# EAGLE board AutoSpiel v1.2b FEDC DRU (EAGLE 9.2.0)
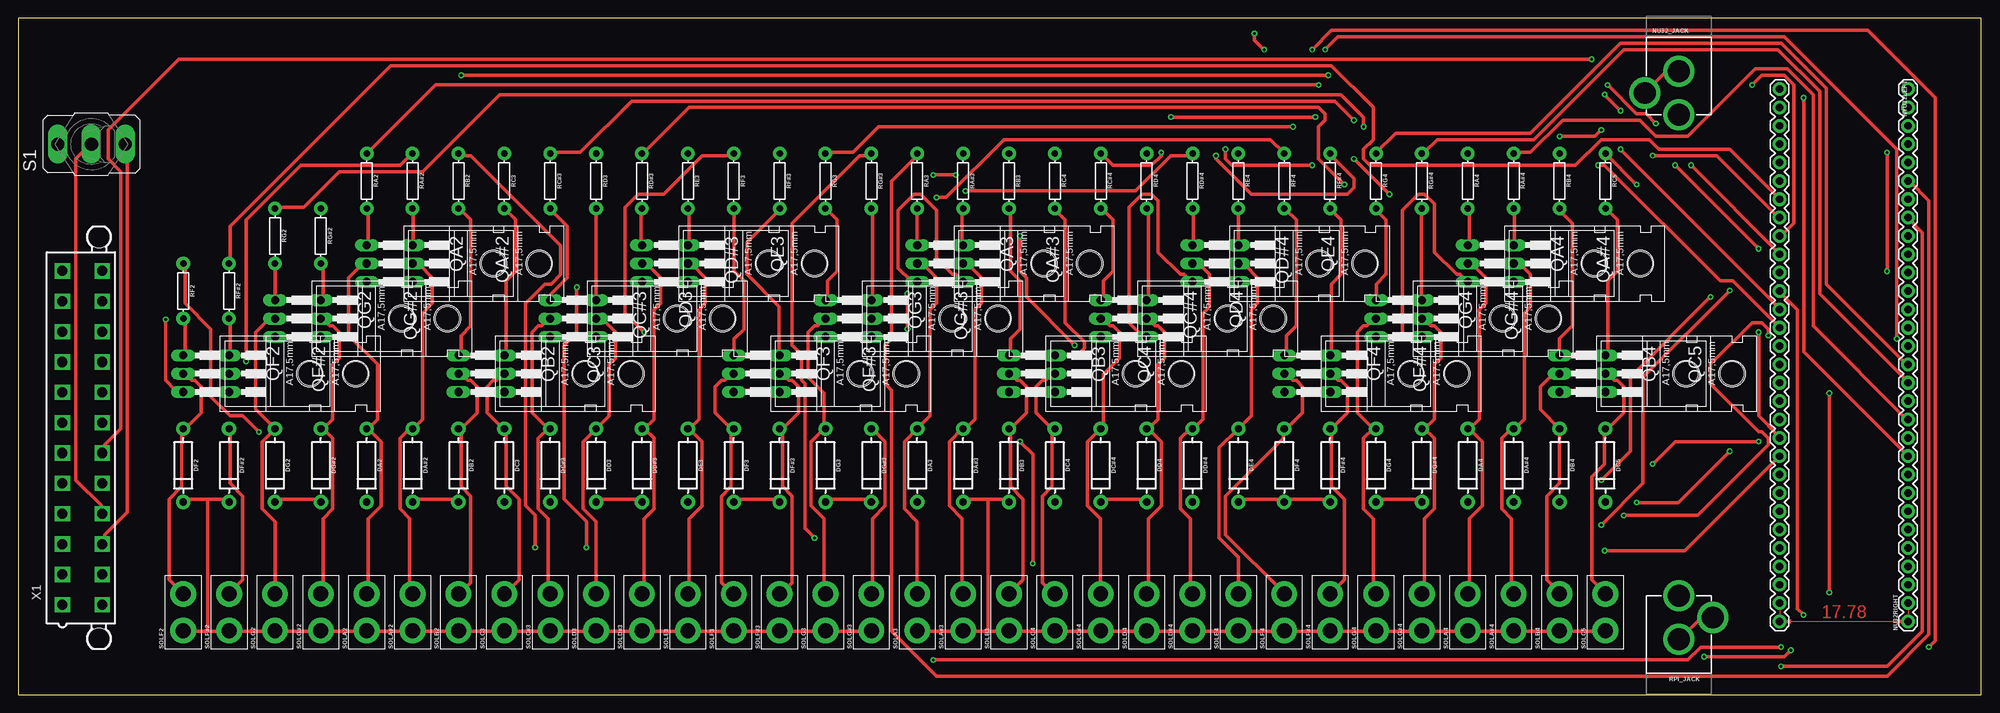
[diagram p0: board, top side]
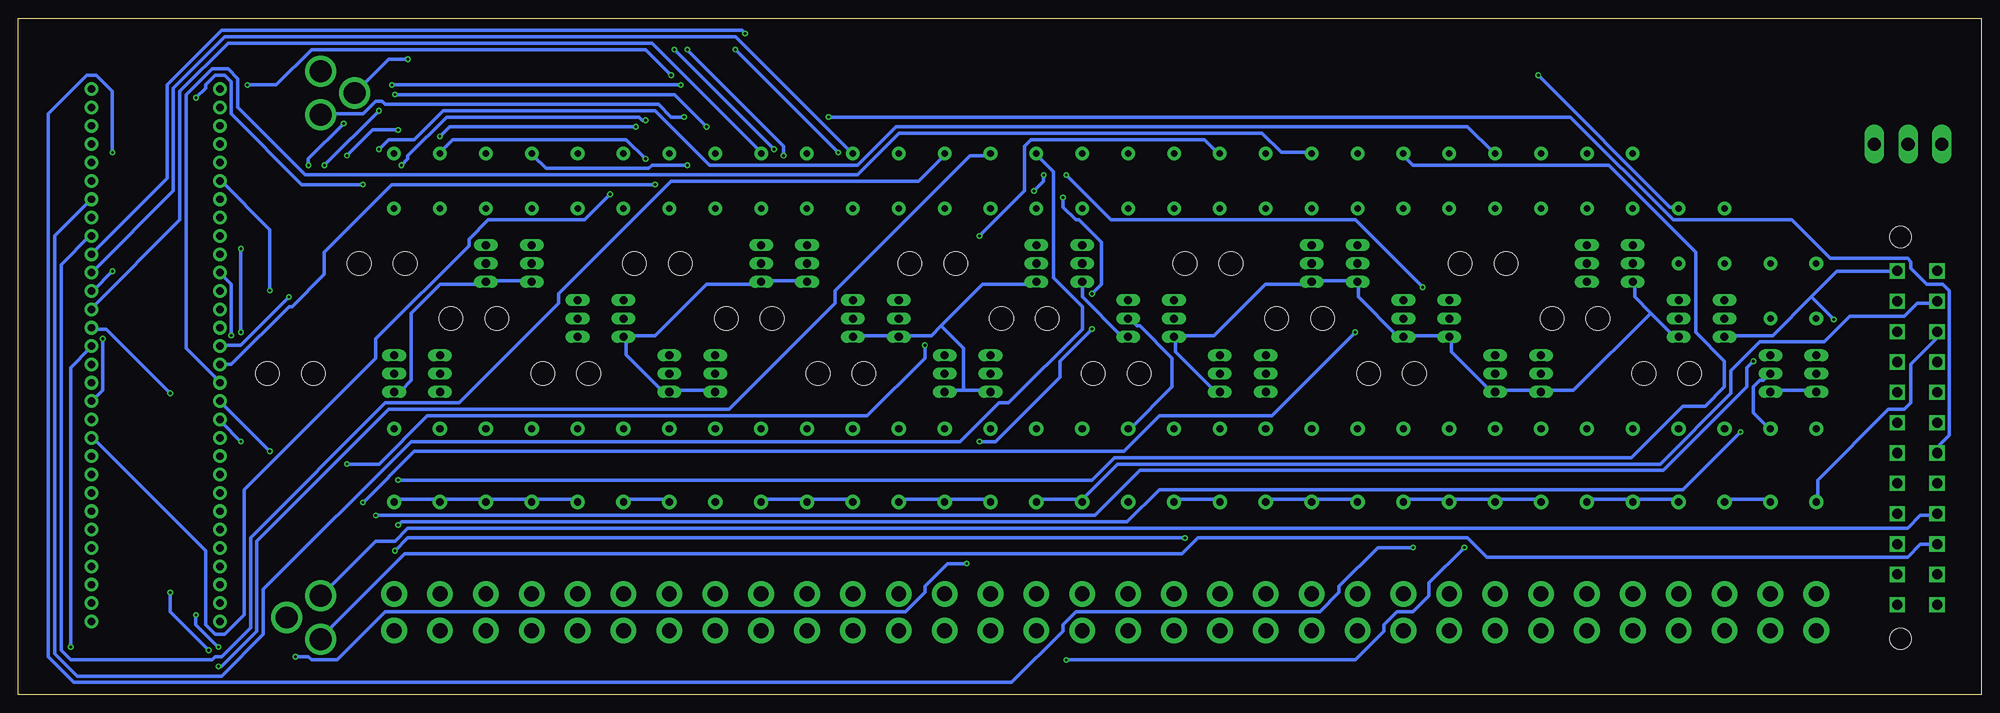
[diagram p1: board, bottom side, seen from below]

Size 271.76 x 93.65 mm. Coordinates in mm from the lower left corner, seen from the top.
Outline: 0,0 271.76,0 271.76,93.65 0,93.65 0,0
Copper layers (1*16): Top 0.035mm / dielectric 1.5mm / Bottom 0.035mm
Design rules "Standard *": minimum track width 20mil, minimum drill 15mil, track to track 15mil, track to pad 15mil, pad to pad 15mil, via to via 15mil, smd to smd 15mil, copper to edge 40mil, drill to drill 10mil, minimum pad ring 8mil, minimum via ring 8mil, stop-mask expansion 4mil, vias tented up to drill 0mil, thermal gap 10mil

## Footprints (pad centres in the part's own frame; a part is rotated, then mirrored left to right if it is on the bottom)
DIODE-1N4001 = drill 1 pad 1.981: A -5.08,0; C 5.08,0
POWER_JACK_PTH = drill 2.997 pad 4.318: GND 0,7.7; GNDBREAK 4.7,10.7; PWR 0,13.7
1X30 = drill 1.016 pad 1.88: 1 0,0; 2 2.54,0; 3 5.08,0; 4 7.62,0; 5 10.16,0; 6 12.7,0; 7 15.24,0; 8 17.78,0; 9 20.32,0; 10 22.86,0; 11 25.4,0; 12 27.94,0; 13 30.48,0; 14 33.02,0; 15 35.56,0; 16 38.1,0; 17 40.64,0; 18 43.18,0; 19 45.72,0; 20 48.26,0; 21 50.8,0; 22 53.34,0; 23 55.88,0; 24 58.42,0; 25 60.96,0; 26 63.5,0; 27 66.04,0; 28 68.58,0; 29 71.12,0; 30 73.66,0
TO220AH = drill 1.118 long: B -2.54,-6.35; C 0,-6.35; E 2.54,-6.35 | hole 3.302: 0,11.176
AXIAL-0.3 = drill 0.9 pad 1.88: P$1 -3.81,0; P$2 3.81,0
M9040P = drill 1.803 long: 1 0,4.699; 2 0,0; 3 0,-4.699
1X02_XTRA_BIG = drill 2.057 pad 3.556: 1 -2.54,0; 2 2.54,0
5566-24 = drill 1.4 square: 1 23.1,-2.75; 2 18.9,-2.75; 3 14.7,-2.75; 4 10.5,-2.75; 5 6.3,-2.75; 6 2.1,-2.75; 7 -2.1,-2.75; 8 -6.3,-2.75; 9 -10.5,-2.75; 10 -14.7,-2.75; 11 -18.9,-2.75; 12 -23.1,-2.75; 13 23.1,2.75; 14 18.9,2.75; 15 14.7,2.75; 16 10.5,2.75; 17 6.3,2.75; 18 2.1,2.75; 19 -2.1,2.75; 20 -6.3,2.75; 21 -10.5,2.75; 22 -14.7,2.75; 23 -18.9,2.75; 24 -23.1,2.75 | hole 3: 27.8,2.29; -27.8,2.29

## Placement (x,y rotation side)
DA2  1A/50V/1.1V  [DIODE-1N4001]  48.26,31.75 270 top
DA3  1A/50V/1.1V  [DIODE-1N4001]  124.46,31.75 270 top
DA4  1A/50V/1.1V  [DIODE-1N4001]  200.66,31.75 270 top
DA#2  1A/50V/1.1V  [DIODE-1N4001]  54.61,31.75 270 top
DA#3  1A/50V/1.1V  [DIODE-1N4001]  130.81,31.75 270 top
DA#4  1A/50V/1.1V  [DIODE-1N4001]  207.01,31.75 270 top
DB2  1A/50V/1.1V  [DIODE-1N4001]  60.96,31.75 270 top
DB3  1A/50V/1.1V  [DIODE-1N4001]  137.16,31.75 270 top
DB4  1A/50V/1.1V  [DIODE-1N4001]  213.36,31.75 270 top
DC3  1A/50V/1.1V  [DIODE-1N4001]  67.31,31.75 270 top
DC4  1A/50V/1.1V  [DIODE-1N4001]  143.51,31.75 270 top
DC5  1A/50V/1.1V  [DIODE-1N4001]  219.71,31.75 270 top
DC#3  1A/50V/1.1V  [DIODE-1N4001]  73.66,31.75 270 top
DC#4  1A/50V/1.1V  [DIODE-1N4001]  149.86,31.75 270 top
DD3  1A/50V/1.1V  [DIODE-1N4001]  80.01,31.75 270 top
DD4  1A/50V/1.1V  [DIODE-1N4001]  156.21,31.75 270 top
DD#3  1A/50V/1.1V  [DIODE-1N4001]  86.36,31.75 270 top
DD#4  1A/50V/1.1V  [DIODE-1N4001]  162.56,31.75 270 top
DE3  1A/50V/1.1V  [DIODE-1N4001]  92.71,31.75 270 top
DE4  1A/50V/1.1V  [DIODE-1N4001]  168.91,31.75 270 top
DF2  1A/50V/1.1V  [DIODE-1N4001]  22.86,31.75 270 top
DF3  1A/50V/1.1V  [DIODE-1N4001]  99.06,31.75 270 top
DF4  1A/50V/1.1V  [DIODE-1N4001]  175.26,31.75 270 top
DF#2  1A/50V/1.1V  [DIODE-1N4001]  29.21,31.75 270 top
DF#3  1A/50V/1.1V  [DIODE-1N4001]  105.41,31.75 270 top
DF#4  1A/50V/1.1V  [DIODE-1N4001]  181.61,31.75 270 top
DG2  1A/50V/1.1V  [DIODE-1N4001]  35.56,31.75 270 top
DG3  1A/50V/1.1V  [DIODE-1N4001]  111.76,31.75 270 top
DG4  1A/50V/1.1V  [DIODE-1N4001]  187.96,31.75 270 top
DG#2  1A/50V/1.1V  [DIODE-1N4001]  41.91,31.75 270 top
DG#3  1A/50V/1.1V  [DIODE-1N4001]  118.11,31.75 270 top
DG#4  1A/50V/1.1V  [DIODE-1N4001]  194.31,31.75 270 top
NU32_JACK  POWER_JACK  [POWER_JACK_PTH]  229.87,93.98 180 top
NU32RIGHT  [1X30]  261.62,10.16 90 top
NYU32LEFT  [1X30]  243.84,10.16 90 top
QA2  TIP120  [TO220AH]  54.61,59.69 270 top
QA3  TIP120  [TO220AH]  130.81,59.69 270 top
QA4  TIP120  [TO220AH]  207.01,59.69 270 top
QA#2  TIP120  [TO220AH]  60.96,59.69 270 top
QA#3  TIP120  [TO220AH]  137.16,59.69 270 top
QA#4  TIP120  [TO220AH]  213.36,59.69 270 top
QB2  TIP120  [TO220AH]  67.31,44.45 270 top
QB3  TIP120  [TO220AH]  143.51,44.45 270 top
QB4  TIP120  [TO220AH]  219.71,44.45 270 top
QC3  TIP120  [TO220AH]  73.66,44.45 270 top
QC4  TIP120  [TO220AH]  149.86,44.45 270 top
QC5  TIP120  [TO220AH]  226.06,44.45 270 top
QC#3  TIP120  [TO220AH]  80.01,52.07 270 top
QC#4  TIP120  [TO220AH]  156.21,52.07 270 top
QD3  TIP120  [TO220AH]  86.36,52.07 270 top
QD4  TIP120  [TO220AH]  162.56,52.07 270 top
QD#3  TIP120  [TO220AH]  92.71,59.69 270 top
QD#4  TIP120  [TO220AH]  168.91,59.69 270 top
QE3  TIP120  [TO220AH]  99.06,59.69 270 top
QE4  TIP120  [TO220AH]  175.26,59.69 270 top
QF2  TIP120  [TO220AH]  29.21,44.45 270 top
QF3  TIP120  [TO220AH]  105.41,44.45 270 top
QF4  TIP120  [TO220AH]  181.61,44.45 270 top
QF#2  TIP120  [TO220AH]  35.56,44.45 270 top
QF#3  TIP120  [TO220AH]  111.76,44.45 270 top
QF#4  TIP120  [TO220AH]  187.96,44.45 270 top
QG2  TIP120  [TO220AH]  41.91,52.07 270 top
QG3  TIP120  [TO220AH]  118.11,52.07 270 top
QG4  TIP120  [TO220AH]  194.31,52.07 270 top
QG#2  TIP120  [TO220AH]  48.26,52.07 270 top
QG#3  TIP120  [TO220AH]  124.46,52.07 270 top
QG#4  TIP120  [TO220AH]  200.66,52.07 270 top
RA2  1k  [AXIAL-0.3]  48.26,71.12 270 top
RA3  1k  [AXIAL-0.3]  124.46,71.12 270 top
RA4  1k  [AXIAL-0.3]  200.66,71.12 270 top
RA#2  1k  [AXIAL-0.3]  54.61,71.12 270 top
RA#3  1k  [AXIAL-0.3]  130.81,71.12 270 top
RA#4  1k  [AXIAL-0.3]  207.01,71.12 270 top
RB2  1k  [AXIAL-0.3]  60.96,71.12 270 top
RB3  1k  [AXIAL-0.3]  137.16,71.12 270 top
RB4  1k  [AXIAL-0.3]  213.36,71.12 270 top
RC3  1k  [AXIAL-0.3]  67.31,71.12 270 top
RC4  1k  [AXIAL-0.3]  143.51,71.12 270 top
RC5  1k  [AXIAL-0.3]  219.71,71.12 270 top
RC#3  1k  [AXIAL-0.3]  73.66,71.12 270 top
RC#4  1k  [AXIAL-0.3]  149.86,71.12 270 top
RD3  1k  [AXIAL-0.3]  80.01,71.12 270 top
RD4  1k  [AXIAL-0.3]  156.21,71.12 270 top
RD#3  1k  [AXIAL-0.3]  86.36,71.12 270 top
RD#4  1k  [AXIAL-0.3]  162.56,71.12 270 top
RE3  1k  [AXIAL-0.3]  92.71,71.12 270 top
RE4  1k  [AXIAL-0.3]  168.91,71.12 270 top
RF2  1k  [AXIAL-0.3]  22.86,55.88 270 top
RF3  1k  [AXIAL-0.3]  99.06,71.12 270 top
RF4  1k  [AXIAL-0.3]  175.26,71.12 270 top
RF#2  1k  [AXIAL-0.3]  29.21,55.88 270 top
RF#3  1k  [AXIAL-0.3]  105.41,71.12 270 top
RF#4  1k  [AXIAL-0.3]  181.61,71.12 270 top
RG2  1k  [AXIAL-0.3]  35.56,63.5 270 top
RG3  1k  [AXIAL-0.3]  111.76,71.12 270 top
RG4  1k  [AXIAL-0.3]  187.96,71.12 270 top
RG#2  1k  [AXIAL-0.3]  41.91,63.5 270 top
RG#3  1k  [AXIAL-0.3]  118.11,71.12 270 top
RG#4  1k  [AXIAL-0.3]  194.31,71.12 270 top
RPI_JACK  POWER_JACK  [POWER_JACK_PTH]  229.87,0 0 top
S1  [M9040P]  10.16,76.2 90 top
SOLA2  [1X02_XTRA_BIG]  48.26,11.43 90 top
SOLA3  [1X02_XTRA_BIG]  124.46,11.43 90 top
SOLA4  [1X02_XTRA_BIG]  200.66,11.43 90 top
SOLA#2  [1X02_XTRA_BIG]  54.61,11.43 90 top
SOLA#3  [1X02_XTRA_BIG]  130.81,11.43 90 top
SOLA#4  [1X02_XTRA_BIG]  207.01,11.43 90 top
SOLB2  [1X02_XTRA_BIG]  60.96,11.43 90 top
SOLB3  [1X02_XTRA_BIG]  137.16,11.43 90 top
SOLB4  [1X02_XTRA_BIG]  213.36,11.43 90 top
SOLC3  [1X02_XTRA_BIG]  67.31,11.43 90 top
SOLC4  [1X02_XTRA_BIG]  143.51,11.43 90 top
SOLC5  [1X02_XTRA_BIG]  219.71,11.43 90 top
SOLC#3  [1X02_XTRA_BIG]  73.66,11.43 90 top
SOLC#4  [1X02_XTRA_BIG]  149.86,11.43 90 top
SOLD3  [1X02_XTRA_BIG]  80.01,11.43 90 top
SOLD4  [1X02_XTRA_BIG]  156.21,11.43 90 top
SOLD#3  [1X02_XTRA_BIG]  86.36,11.43 90 top
SOLD#4  [1X02_XTRA_BIG]  162.56,11.43 90 top
SOLE3  [1X02_XTRA_BIG]  92.71,11.43 90 top
SOLE4  [1X02_XTRA_BIG]  168.91,11.43 90 top
SOLF2  [1X02_XTRA_BIG]  22.86,11.43 90 top
SOLF3  [1X02_XTRA_BIG]  99.06,11.43 90 top
SOLF4  [1X02_XTRA_BIG]  175.26,11.43 90 top
SOLF#2  [1X02_XTRA_BIG]  29.21,11.43 90 top
SOLF#3  [1X02_XTRA_BIG]  105.41,11.43 90 top
SOLF#4  [1X02_XTRA_BIG]  181.61,11.43 90 top
SOLG2  [1X02_XTRA_BIG]  35.56,11.43 90 top
SOLG3  [1X02_XTRA_BIG]  111.76,11.43 90 top
SOLG4  [1X02_XTRA_BIG]  187.96,11.43 90 top
SOLG#2  [1X02_XTRA_BIG]  41.91,11.43 90 top
SOLG#3  [1X02_XTRA_BIG]  118.11,11.43 90 top
SOLG#4  [1X02_XTRA_BIG]  194.31,11.43 90 top
X1  5566-24  [5566-24]  8.89,35.56 270 top

## Library data of the parts
DA2-DA4 DA#2-DA#4 DB2-DB4 DC3-DC5 DC#3 DC#4 DD3 DD4 DD#3 DD#4 DE3 DE4 DF2-DF4 DF#2-DF#4 DG2-DG4 DG#2-DG#4 = SparkFun-DiscreteSemi; PROD_ID: DIO-09176
NU32_JACK RPI_JACK = SparkFun-Connectors; PROD_ID: CONN-08197
NU32RIGHT NYU32LEFT SOLA2-SOLA4 SOLA#2-SOLA#4 SOLB2-SOLB4 SOLC3-SOLC5 SOLC#3 SOLC#4 SOLD3 SOLD4 SOLD#3 SOLD#4 SOLE3 SOLE4 SOLF2-SOLF4 SOLF#2-SOLF#4 SOLG2-SOLG4 SOLG#2-SOLG#4 = SparkFun-Connectors
QA2-QA4 QA#2-QA#4 QB2-QB4 QC3-QC5 QC#3 QC#4 QD3 QD4 QD#3 QD#4 QE3 QE4 QF2-QF4 QF#2-QF#4 QG2-QG4 QG#2-QG#4 = transistor-power
RA2-RA4 RA#2-RA#4 RB2-RB4 RC3-RC5 RC#3 RC#4 RD3 RD4 RD#3 RD#4 RE3 RE4 RF2-RF4 RF#2-RF#4 RG2-RG4 RG#2-RG#4 = SparkFun-Resistors; PROD_ID: RES-08380
S1 = switch
X1 = con-molex; MF: MOLEX; OC_FARNELL: unknown; OC_NEWARK: unknown

## Nets
A2: NYU32LEFT.21 RA2.P$1
A3: NU32RIGHT.25 RA3.P$1
A4: NU32RIGHT.13 RA4.P$1
A#2: NYU32LEFT.20 RA#2.P$1
A#3: NU32RIGHT.24 RA#3.P$1
A#4: NU32RIGHT.12 RA#4.P$1
B2: NYU32LEFT.19 RB2.P$1
B3: NU32RIGHT.23 RB3.P$1
B4: NU32RIGHT.11 RB4.P$1
C3: NYU32LEFT.18 RC3.P$1
C4: NU32RIGHT.22 RC4.P$1
C5: NU32RIGHT.10 RC5.P$1
C#3: NYU32LEFT.17 RC#3.P$1
C#4: NU32RIGHT.21 RC#4.P$1
D3: NYU32LEFT.16 RD3.P$1
D4: NU32RIGHT.20 RD4.P$1
D#3: NYU32LEFT.15 RD#3.P$1
D#4: NU32RIGHT.19 RD#4.P$1
E3: NYU32LEFT.14 RE3.P$1
E4: NU32RIGHT.18 RE4.P$1
F2: NYU32LEFT.25 RF2.P$1
F3: NYU32LEFT.13 RF3.P$1
F4: NU32RIGHT.17 RF4.P$1
F#2: NYU32LEFT.24 RF#2.P$1
F#3: NYU32LEFT.12 RF#3.P$1
F#4: NU32RIGHT.16 RF#4.P$1
G2: NYU32LEFT.23 RG2.P$1
G3: NYU32LEFT.11 RG3.P$1
G4: NU32RIGHT.15 RG4.P$1
G#2: NYU32LEFT.22 RG#2.P$1
G#3: NYU32LEFT.10 RG#3.P$1
G#4: NU32RIGHT.14 RG#4.P$1
GND: QA2.E QA3.E QA4.E QA#2.E QA#3.E QA#4.E QB2.E QB3.E QB4.E QC3.E QC4.E QC5.E QC#3.E QC#4.E QD3.E QD4.E QD#3.E QD#4.E QE3.E QE4.E QF2.E QF3.E QF4.E QF#2.E QF#3.E QF#4.E QG2.E QG3.E QG4.E QG#2.E QG#3.E QG#4.E X1.24
N$1: QF2.B RF2.P$2
N$2: QC#3.B RC#3.P$2
N$3: DF2.A QF2.C SOLF2.2
N$4: QF#2.B RF#2.P$2
N$5: DF#2.A QF#2.C SOLF#2.2
N$6: DC#3.A QC#3.C SOLC#3.2
N$7: QG2.B RG2.P$2
N$8: DG2.A QG2.C SOLG2.2
N$9: QD3.B RD3.P$2
N$10: QG#2.B RG#2.P$2
N$11: DG#2.A QG#2.C SOLG#2.2
N$12: DD3.A QD3.C SOLD3.2
N$13: QA2.B RA2.P$2
N$14: DA2.A QA2.C SOLA2.2
N$15: QD#3.B RD#3.P$2
N$16: QA#2.B RA#2.P$2
N$17: DA#2.A QA#2.C SOLA#2.2
N$18: DD#3.A QD#3.C SOLD#3.2
N$19: QB2.B RB2.P$2
N$20: DB2.A QB2.C SOLB2.2
N$21: QE3.B RE3.P$2
N$22: QC3.B RC3.P$2
N$23: DC3.A QC3.C SOLC3.2
N$24: DE3.A QE3.C SOLE3.2
N$25: QA3.B RA3.P$2
N$26: DA3.A QA3.C SOLA3.2
N$27: QF3.B RF3.P$2
N$28: DF3.A QF3.C SOLF3.2
N$29: QF#3.B RF#3.P$2
N$30: DF#3.A QF#3.C SOLF#3.2
N$31: QG3.B RG3.P$2
N$32: DG3.A QG3.C SOLG3.2
N$33: QG#3.B RG#3.P$2
N$34: DG#3.A QG#3.C SOLG#3.2
N$35: QF4.B RF4.P$2
N$36: DF4.A QF4.C SOLF4.2
N$37: QF#4.B RF#4.P$2
N$38: DF#4.A QF#4.C SOLF#4.2
N$39: QG4.B RG4.P$2
N$40: DG4.A QG4.C SOLG4.2
N$41: QG#4.B RG#4.P$2
N$42: DG#4.A QG#4.C SOLG#4.2
N$43: QA4.B RA4.P$2
N$44: DA4.A QA4.C SOLA4.2
N$45: QA#4.B RA#4.P$2
N$46: DA#4.A QA#4.C SOLA#4.2
N$47: QB4.B RB4.P$2
N$48: DB4.A QB4.C SOLB4.2
N$49: QC5.B RC5.P$2
N$50: DC5.A QC5.C SOLC5.2
N$52: QA#3.B RA#3.P$2
N$53: DA#3.A QA#3.C SOLA#3.2
N$55: QB3.B RB3.P$2
N$56: DB3.A QB3.C SOLB3.2
N$57: S1.1
N$58: QC4.B RC4.P$2
N$59: DC4.A QC4.C SOLC4.2
N$61: QC#4.B RC#4.P$2
N$62: DC#4.A QC#4.C SOLC#4.2
N$64: QD4.B RD4.P$2
N$65: DD4.A QD4.C SOLD4.2
N$67: QD#4.B RD#4.P$2
N$68: DD#4.A QD#4.C SOLD#4.2
N$70: QE4.B RE4.P$2
N$71: DE4.A QE4.C SOLE4.2
NU32GND: NU32_JACK.GND NU32_JACK.GNDBREAK X1.18
NU32PWR: NU32_JACK.PWR X1.6
PS_ON: S1.2 X1.16
PS_ONGND: S1.3 X1.15
RPI_GND: RPI_JACK.GND RPI_JACK.GNDBREAK X1.3
RPI_PWR: RPI_JACK.PWR X1.4
VDD1: DA2.C DA#2.C DB2.C DC3.C DC#3.C DD3.C DD#3.C DE3.C DF2.C DF3.C DF#2.C DF#3.C DG2.C DG3.C DG#2.C DG#3.C SOLA2.1 SOLA#2.1 SOLB2.1 SOLC3.1 SOLC#3.1 SOLD3.1 SOLD#3.1 SOLE3.1 SOLF2.1 SOLF3.1 SOLF#2.1 SOLF#3.1 SOLG2.1 SOLG3.1 SOLG#2.1 SOLG#3.1 X1.10
VDD2: DA3.C DA4.C DA#3.C DA#4.C DB3.C DB4.C DC4.C DC5.C DC#4.C DD4.C DD#4.C DE4.C DF4.C DF#4.C DG4.C DG#4.C SOLA3.1 SOLA4.1 SOLA#3.1 SOLA#4.1 SOLB3.1 SOLB4.1 SOLC4.1 SOLC5.1 SOLC#4.1 SOLD4.1 SOLD#4.1 SOLE4.1 SOLF4.1 SOLF#4.1 SOLG4.1 SOLG#4.1 X1.11

## Tracks (layer width: path | path; a pad name or v marks a point on that pad's centre or on a via)
A2  (via drill 0.38)
  Top 0.508: v231.58,73.28 243.59,61.28 NYU32LEFT.21 | v226.69,79.06 225.36,80.39 224.03,80.39 v220.03,84.39 | v180.02,84.39 57.78,84.39 48.45,75.06 RA2.P$1
  Bottom 0.508: v231.58,73.28 231.58,74.17 v226.69,79.06 | v180.02,84.39 v220.03,84.39
A3
  Top 0.508: NU32RIGHT.25 261.81,71.06 264.48,68.39 264.48,8.38 258.7,2.6 127.13,2.6 120.9,8.83 120.9,42.16 120.02,43.05 120.02,48.39 120.9,49.28 120.9,71.06 124.46,74.61 RA3.P$1
A4  (via drill 0.38)
  Top 0.508: v260.03,49.28 260.03,75.5 244.47,91.06 182.69,91.06 v180.91,89.28 | v167.13,75.5 167.13,74.17 168.02,73.28 v179.13,73.28
  Bottom 0.508: v260.03,49.28 260.03,42.16 261.37,40.83 NU32RIGHT.13 | v167.13,75.5 v180.91,89.28 | v179.13,73.28 184.02,73.28 184.47,72.83 198.69,72.83 200.47,74.61 RA4.P$1
A#2  (via drill 0.38)
  Top 0.508: v242.25,49.72 242.25,50.61 241.36,51.5 240.03,51.5 234.25,45.72 234.25,43.05 240.92,36.39 241.36,36.39 242.25,35.5 242.25,34.61 232.47,24.83 v222.25,24.83 | v31.56,46.16 31.56,65.72 39.12,73.28 52.9,73.28 54.23,74.61 RA#2.P$1
  Bottom 0.508: NYU32LEFT.20 242.25,56.83 v242.25,49.72 | v222.25,24.83 122.68,24.83 116.46,31.05 44.01,31.05 32.45,42.61 32.45,45.28 v31.56,46.16
A#3
  Bottom 0.508: NU32RIGHT.24 266.7,63.5 266.7,5.71 263.59,2.6 243.59,2.6 237.81,8.38 237.81,14.6 217.36,35.05 141.35,35.05 136.02,40.39 134.68,40.39 124.46,50.61 124.46,53.72 128.46,57.72 128.46,72.39 130.68,74.61 RA#3.P$1
A#4
  Top 0.508: NU32RIGHT.12 261.37,38.16 248.48,51.05 248.48,83.06 244.92,86.61 240.47,86.61 231.14,77.28 226.69,77.28 224.47,79.5 213.8,79.5 209.36,75.06 207.14,75.06 RA#4.P$1
B2  (via drill 0.38)
  Top 0.508: v247.14,11.05 246.25,11.94 246.25,53.28 244.03,55.5 NYU32LEFT.19 | v244.03,6.6 232.92,6.6 231.14,4.83 v126.68,4.83 | v71.56,20.38 71.56,24.83 70.23,26.16 70.23,54.17 72.9,56.83 73.79,56.83 75.12,58.17 75.12,62.17 62.67,74.61 61.34,74.61 RB2.P$1
  Bottom 0.508: v247.14,11.05 247.14,9.71 v244.03,6.6 | v126.68,4.83 86.68,4.83 82.68,8.83 82.68,9.71 80.9,11.49 78.68,11.49 76.45,13.72 76.45,15.49 v71.56,20.38
B3  (via drill 0.38)
  Top 0.508: v244.03,3.94 258.7,3.94 263.59,8.83 263.59,63.94 261.81,65.72 NU32RIGHT.23
  Bottom 0.508: v244.03,3.94 243.59,3.94 238.7,8.83 238.7,21.27 220.47,39.5 173.35,39.5 158.69,54.17 158.69,55.94 140.02,74.61 137.35,74.61 RB3.P$1
B4  (via drill 0.38)
  Top 0.508: v184.91,74.17 v189.8,69.28
  Bottom 0.508: v189.8,69.28 193.36,65.72 206.69,65.72 209.36,63.06 209.36,62.17 222.25,49.28 222.25,46.61 240.47,28.38 240.47,11.05 243.14,8.38 244.47,8.38 245.81,9.71 245.81,19.94 261.37,35.5 NU32RIGHT.11 | v184.91,74.17 187.58,76.83 211.58,76.83 213.36,75.06 RB4.P$1
C3  (via drill 0.38)
  Top 0.508: v221.81,75.5 243.59,53.72 NYU32LEFT.18
  Bottom 0.508: v221.81,75.5 220.47,76.83 216.92,76.83 212.92,80.84 183.58,80.84 176.02,73.28 155.57,73.28 150.24,78.61 71.12,78.61 67.56,75.06 RC3.P$1
C4
  Bottom 0.508: NU32RIGHT.22 261.81,63.5 265.81,59.5 265.81,6.16 264.48,4.83 244.92,4.83 244.47,5.27 243.59,5.27 239.59,9.27 239.59,21.72 220.92,40.39 210.69,40.39 196.91,54.17 196.91,55.5 181.36,71.06 147.13,71.06 143.57,74.61 RC4.P$1
C5  (via drill 0.38)
  Top 0.508: NU32RIGHT.10 247.14,47.5 v247.14,82.61 | RC5.P$1 v224.03,70.61
  Bottom 0.508: v247.14,82.61 245.81,83.95 245.81,84.39 244.47,85.72 243.14,85.72 242.25,84.84 242.25,80.39 232.47,70.61 v224.03,70.61
C#3  (via drill 0.38)
  Top 0.508: v184.91,79.5 182.25,82.17 84.9,82.17 77.79,75.06 73.79,75.06 RC#3.P$1 | v218.69,73.28 219.58,73.28 235.59,57.28 237.36,57.28 NYU32LEFT.17
  Bottom 0.508: v184.91,79.5 185.36,79.5 185.8,79.95 212.47,79.95 217.81,74.61 217.81,74.17 v218.69,73.28
C#4  (via drill 0.38)
  Top 0.508: v171.13,91.5 171.13,90.61 v172.47,89.28 | v158.24,75.06 158.24,74.61 156.91,73.28 151.57,73.28 150.24,74.61 RC#4.P$1
  Bottom 0.508: v171.13,91.5 171.58,91.95 243.59,91.95 251.14,84.39 251.14,71.5 261.37,61.28 NU32RIGHT.21 | v158.24,75.06 v172.47,89.28
D3  (via drill 0.38)
  Top 0.508: v234.25,55.05 223.14,43.94 223.14,33.72 v219.14,29.72
  Bottom 0.508: v234.25,55.05 240.92,48.39 243.59,48.39 NYU32LEFT.16 | v219.14,29.72 123.13,29.72 120.02,32.83 48.45,32.83 41.34,39.94 38.23,39.94 35.56,42.61 35.56,46.16 39.56,50.16 39.56,61.28 51.56,73.28 78.68,73.28 80.01,74.61 RD3.P$1
D4
  Bottom 0.508: NU32RIGHT.20 261.37,58.61 250.25,69.72 250.25,83.95 243.14,91.06 172.47,91.06 156.46,75.06 RD4.P$1
D#3  (via drill 0.38)
  Top 0.508: v183.58,70.61 180.02,74.17 180.02,78.61 180.91,79.5 180.91,80.39 180.02,81.28 92.9,81.28 86.68,75.06 RD#3.P$1
  Bottom 0.508: NYU32LEFT.15 242.25,45.72 234.25,53.72 233.81,53.72 229.36,58.17 229.36,61.28 220.03,70.61 v183.58,70.61
D#4  (via drill 0.38)
  Top 0.508: v258.7,75.06 v258.7,58.61 | v78.68,20.38 78.68,23.94 75.56,27.05 75.56,48.39 77.34,50.16 v77.34,56.39 | v129.79,71.94 v126.68,71.94 | v131.13,69.72 154.69,69.72 159.58,74.61 162.24,74.61 RD#4.P$1
  Bottom 0.508: v258.7,58.61 261.37,55.94 NU32RIGHT.19 | v258.7,75.06 258.7,83.5 260.92,85.72 262.25,85.72 267.59,80.39 267.59,5.27 264.03,1.71 134.24,1.71 127.13,8.83 127.13,9.71 125.35,11.49 91.57,11.49 88.9,14.16 88.9,15.05 83.57,20.38 v78.68,20.38 | v77.34,56.39 86.68,65.72 120.46,65.72 v126.68,71.94 | v129.79,71.94 129.79,71.06 v131.13,69.72
E3
  Bottom 0.508: RE3.P$1 92.9,75.06 96.9,75.06 99.57,77.72 149.8,77.72 155.57,71.94 232.03,71.94 241.36,81.28 241.36,85.28 242.7,86.61 244.92,86.61 248.48,83.06 248.48,47.94 244.03,43.5 NYU32LEFT.14
E4
  Bottom 0.508: NU32RIGHT.18 261.37,53.72 249.36,65.72 249.36,83.5 242.7,90.17 184.02,90.17 168.91,75.06 RE4.P$1
F2  (via drill 0.38)
  Top 0.508: v33.34,36.39 31.11,38.61 29.34,38.61 26.67,41.27 26.67,50.61 23.11,54.17 23.11,59.5 RF2.P$1 | v219.14,23.49 224.92,29.27 224.92,43.94 v236.92,55.94
  Bottom 0.508: v33.34,36.39 41.34,28.38 113.79,28.38 118.24,23.94 218.69,23.94 v219.14,23.49 | v236.92,55.94 236.92,64.39 243.59,71.06 NYU32LEFT.25
F3  (via drill 0.38)
  Top 0.508: v86.68,50.16 84.01,52.83 84.01,67.5 85.79,69.28 89.34,69.28 94.68,74.61 98.68,74.61 RF3.P$1 | v224.03,26.61 229.81,26.61 v236.92,33.72
  Bottom 0.508: v86.68,50.16 98.23,38.61 113.79,38.61 118.68,33.72 216.92,33.72 v224.03,26.61 | NYU32LEFT.13 v236.92,33.72
F4  (via drill 0.38)
  Top 0.508: v250.7,14.16 v250.7,41.72 | v245.36,6.16 244.47,5.27 v233.36,5.27 | v140.46,18.16 140.46,33.27 v138.68,35.05 | v123.13,55.5 v123.13,50.61 | v127.13,68.83 128.46,68.83 136.46,76.83 173.35,76.83 RF4.P$1
  Bottom 0.508: v250.7,41.72 259.59,50.61 261.37,50.61 NU32RIGHT.17 | v250.7,14.16 250.7,11.49 v245.36,6.16 | v233.36,5.27 231.58,5.27 231.14,4.83 227.58,4.83 220.92,11.49 148.91,11.49 146.24,14.16 146.24,15.05 143.13,18.16 v140.46,18.16 | v138.68,35.05 136.46,35.05 127.57,43.94 127.57,46.16 v123.13,50.61 | v123.13,55.5 121.79,56.83 121.79,62.61 124.9,65.72 125.35,65.72 127.13,67.5 v127.13,68.83
F#2
  Top 0.508: NYU32LEFT.24 236.92,75.5 227.14,75.5 225.81,76.83 219.14,76.83 215.58,73.28 187.13,73.28 186.25,74.17 186.25,75.5 187.58,76.83 187.58,81.28 181.8,87.06 51.56,87.06 29.34,64.83 29.34,59.94 RF#2.P$1
F#3  (via drill 0.38)
  Top 0.508: v240.92,35.05 229.36,35.05 v226.25,31.94 | v146.24,48.39 139.57,55.05 139.57,57.72 138.68,58.61 v138.68,63.5
  Bottom 0.508: v240.92,35.05 243.59,37.72 NYU32LEFT.12 | v226.25,31.94 221.81,31.94 215.14,38.61 154.24,38.61 146.24,46.61 v146.24,48.39 | v138.68,63.5 132.46,69.72 132.46,75.95 131.57,76.83 107.57,76.83 105.79,75.06 RF#3.P$1
F#4  (via drill 0.38)
  Top 0.508: v264.48,6.6 265.37,7.49 265.37,82.61 256.03,91.95 181.8,91.95 v179.13,89.28 | v165.8,74.61 165.8,74.17 170.69,69.28 184.02,69.28 184.91,70.17 184.91,71.5 181.8,74.61 RF#4.P$1
  Bottom 0.508: v264.48,6.6 264.48,45.28 261.81,47.94 NU32RIGHT.16 | v179.13,89.28 165.8,75.95 v165.8,74.61
G2  (via drill 0.38)
  Top 0.508: v186.25,78.61 186.25,79.95 183.13,83.06 66.67,83.06 56.01,72.39 44.45,72.39 39.56,67.5 35.56,67.5 RG2.P$1 | v213.36,77.28 218.25,77.28 v219.14,78.17 | v226.25,74.61 235.14,74.61 243.59,66.17 NYU32LEFT.23
  Bottom 0.508: v186.25,78.61 212.03,78.61 v213.36,77.28 | v219.14,78.17 222.69,78.17 v226.25,74.61
G3  (via drill 0.38)
  Top 0.508: v176.47,78.61 119.13,78.61 115.57,75.06 112.01,75.06 RG3.P$1 | v221.81,80.84 v219.58,83.06 | v240.92,61.72 v229.36,73.28 | v240.92,50.16 240.92,38.61 243.59,35.94 NYU32LEFT.11
  Bottom 0.508: v176.47,78.61 180.91,83.06 v219.58,83.06 | v229.36,73.28 v221.81,80.84 | v240.92,50.16 v240.92,61.72
G4
  Top 0.508: NU32RIGHT.15 261.37,45.72 250.25,56.83 250.25,83.95 244.03,90.17 221.81,90.17 209.36,77.72 190.69,77.72 188.02,75.06 RG4.P$1
G#2  (via drill 0.38)
  Top 0.508: v240.03,84.39 241.36,85.72 244.47,85.72 245.81,84.39 245.81,65.28 244.03,63.5 NYU32LEFT.22 | v61.34,85.72 v181.36,85.72
  Bottom 0.508: v240.03,84.39 236.03,84.39 231.14,89.28 184.91,89.28 v181.36,85.72 | v61.34,85.72 43.12,67.5 42.23,67.5 RG#2.P$1
G#3  (via drill 0.38)
  Top 0.508: v110.24,21.72 108.9,23.05 108.9,43.05 108.46,43.5 108.46,47.05 107.12,48.39 107.12,65.28 116.46,74.61 117.79,74.61 RG#3.P$1 | v219.58,19.94 230.7,19.94 243.59,32.83 NYU32LEFT.10
  Bottom 0.508: v110.24,21.72 217.81,21.72 v219.58,19.94
G#4
  Top 0.508: NU32RIGHT.14 261.37,43.5 249.36,55.5 249.36,83.5 243.59,89.28 222.25,89.28 209.8,76.83 196.47,76.83 194.69,75.06 RG#4.P$1
GND  (via drill 0.38)
  Top 0.508: QB4.E 213.36,42.16 219.58,42.16 QC5.E | 191.58,49.72 194.25,49.72 QG#4.E | 191.58,49.72 188.02,49.72 QG4.E | 191.58,49.72 191.58,67.06 193.8,69.28 194.69,69.28 196.02,67.94 196.02,61.28 199.14,58.17 199.58,58.17 200.47,57.28 QA4.E | QA2.E 48.45,57.28 54.23,57.28 QA#2.E | QG2.E 35.56,49.72 41.78,49.72 QG#2.E | v20.45,51.94 20.45,43.5 21.78,42.16 22.67,42.16 QF2.E | QF3.E 99.12,42.16 105.35,42.16 QF#3.E | QG3.E 112.01,49.72 117.79,49.72 QG#3.E | QA#3.E 129.79,58.17 129.35,58.17 127.13,60.39 127.13,67.06 124.9,69.28 124.02,69.28 121.79,67.06 121.79,59.05 123.57,57.28 124.46,57.28 QA3.E | QD#4.E 162.24,57.28 161.35,58.17 160.91,58.17 157.8,61.28 157.8,68.39 156.91,69.28 155.57,69.28 153.8,67.5 153.8,51.5 156.02,49.28 QD4.E
  Bottom 0.508: QA4.E 200.91,57.28 206.69,57.28 QA#4.E 207.14,56.83 213.36,56.83 217.36,52.83 217.36,43.5 218.69,42.16 219.58,42.16 QC5.E | QD#4.E 162.69,57.28 168.91,57.28 QE4.E 168.91,56.83 176.47,56.83 183.58,49.72 187.58,49.72 QG4.E 187.58,49.28 187.58,47.05 182.69,42.16 181.8,42.16 QF#4.E 181.36,42.16 175.58,42.16 QF4.E | QF2.E 23.11,42.16 28.89,42.16 QF#2.E | 23.56,55.05 28.89,49.72 35.56,49.72 QG2.E | 23.56,55.05 20,58.61 12,58.61 X1.24 | 23.56,55.05 v20.45,51.94 | 45.78,52.83 42.23,49.28 QG#2.E | 45.78,52.83 48.01,55.05 48.01,56.83 QA2.E | 140.91,42.16 143.13,42.16 QC4.E | 140.91,42.16 137.35,42.16 QB3.E | QD4.E 156.02,49.72 150.24,49.72 QC#4.E 149.8,49.72 145.35,49.72 144.02,51.05 | 144.02,51.05 138.24,56.83 131.13,56.83 QA#3.E | 140.91,42.16 140.91,47.94 144.02,51.05 | QA3.E 124.46,55.05 119.13,49.72 118.24,49.72 QG#3.E | QF#3.E 105.79,42.16 106.24,42.16 111.57,47.5 111.57,49.28 QG3.E 111.57,49.72 106.24,49.72 99.12,56.83 92.9,56.83 QE3.E 92.46,57.28 86.68,57.28 QD#3.E 86.23,56.83 86.23,55.05 80.9,49.72 80.01,49.72 | 80.01,49.72 73.79,49.72 QC#3.E 73.34,49.28 73.34,47.5 68.01,42.16 67.56,42.16 QC3.E 67.12,42.16 61.34,42.16 QB2.E 60.9,42.16 56.45,42.16 45.78,52.83 | 80.01,49.72 QD3.E
N$1
  Top 0.508: QF2.B 23.11,47.05 23.11,51.94 RF2.P$2
N$2
  Top 0.508: QC#3.B 73.79,54.61 73.79,55.5 76.01,57.72 76.01,64.83 73.79,67.06 RC#3.P$2
N$3
  Top 0.508: QF2.C 23.11,44.39 24,43.5 24.45,43.5 25.34,42.61 25.34,39.05 23.11,36.83 DF2.A 22.67,36.83 22.67,28.83 20.89,27.05 20.89,15.94 SOLF2.2
N$4
  Top 0.508: QF#2.B 29.34,47.05 29.34,51.94 RF#2.P$2
N$5
  Top 0.508: DF#2.A 29.34,36.83 29.34,29.27 31.11,27.5 31.11,15.94 29.34,14.16 SOLF#2.2
  Bottom 0.508: QF#2.C 29.34,44.39 30.23,43.5 30.67,43.5 31.56,42.61 31.56,39.05 29.34,36.83 DF#2.A
N$6
  Top 0.508: 73.34,36.83 71.12,39.05 71.12,50.16 72.01,51.05 72.45,51.05 73.34,51.94 QC#3.C | 73.34,36.83 72.01,35.5 72.01,25.72 73.34,24.38 73.34,14.16 SOLC#3.2 | 73.34,36.83 DC#3.A
N$7
  Top 0.508: RG2.P$2 QG2.B
N$8
  Top 0.508: QG2.C 35.56,51.94 34.67,51.94 32.89,50.16 32.89,39.5 DG2.A 33.78,35.05 33.78,25.72 35.56,23.94 SOLG2.2
N$9
  Top 0.508: RD3.P$2 QD3.B
N$10
  Top 0.508: QG#2.B 42.23,54.61 42.23,59.5 RG#2.P$2
N$11
  Top 0.508: 42.23,36.83 43.56,38.16 43.56,45.72 44.45,46.61 44.45,50.16 43.56,51.05 43.12,51.05 42.23,51.94 QG#2.C | 42.23,36.83 43.56,35.5 43.56,25.72 42.23,24.38 42.23,14.16 SOLG#2.2 | 42.23,36.83 DG#2.A
N$12
  Top 0.508: QD3.C 80.01,51.94 80.9,51.94 82.68,50.16 82.68,46.61 81.79,45.72 81.79,38.61 DD3.A 78.23,35.05 78.23,25.72 80.01,23.94 SOLD3.2
N$13
  Top 0.508: QA2.B 48.45,62.61 48.45,67.06 RA2.P$2
N$14
  Top 0.508: 48.45,36.83 49.78,38.16 49.78,45.72 45.78,49.72 45.78,57.72 47.56,59.5 48.01,59.5 QA2.C | 48.45,36.83 50.23,35.05 50.23,26.16 48.45,24.38 48.45,14.16 SOLA2.2 | 48.45,36.83 DA2.A
N$15
  Top 0.508: QD#3.B 86.23,62.61 86.23,67.06 RD#3.P$2
N$16
  Top 0.508: QA#2.B 54.67,62.61 54.67,67.06 RA#2.P$2
N$17
  Top 0.508: QA#2.C 54.67,59.5 55.56,59.5 57.34,57.72 57.34,54.17 56.01,52.83 56.01,38.16 54.67,36.83 DA#2.A 54.23,36.83 52.9,35.5 52.9,25.72 54.23,24.38 54.23,14.16 SOLA#2.2
N$18
  Top 0.508: 86.68,36.83 88.01,38.16 88.01,53.28 88.9,54.17 88.9,57.72 87.12,59.5 86.68,59.5 QD#3.C | 86.68,36.83 88.01,35.5 88.01,25.72 86.68,24.38 86.68,14.16 SOLD#3.2 | 86.68,36.83 DD#3.A
N$19
  Top 0.508: QB2.B 61.34,47.05 61.34,49.72 62.67,51.05 62.67,65.72 61.34,67.06 RB2.P$2
N$20
  Top 0.508: 61.34,36.83 63.56,39.05 63.56,42.61 62.67,43.5 62.23,43.5 61.34,44.39 QB2.C | 61.34,36.83 61.34,28.83 62.67,27.5 62.67,15.49 61.34,14.16 SOLB2.2 | 61.34,36.83 DB2.A
N$21
  Top 0.508: QE3.B 92.9,62.61 92.9,67.06 RE3.P$2
N$22
  Top 0.508: RC3.P$2 68.9,65.72 68.9,58.61 67.56,57.28 67.56,47.05 QC3.B
N$23
  Top 0.508: QC3.C 67.12,44.39 66.23,43.5 65.79,43.5 64.9,42.61 64.9,39.05 67.12,36.83 DC3.A 67.56,36.83 67.56,28.83 69.34,27.05 69.34,15.94 67.56,14.16 SOLC3.2
N$24
  Top 0.508: 92.9,36.83 94.23,38.16 94.23,53.28 95.12,54.17 95.12,57.72 93.34,59.5 92.9,59.5 QE3.C | 92.9,36.83 94.68,35.05 94.68,26.16 92.9,24.38 92.9,14.16 SOLE3.2 | 92.9,36.83 DE3.A
N$25
  Top 0.508: RA3.P$2 QA3.B
N$26
  Top 0.508: QA3.C 124.46,59.5 125.35,59.5 127.13,57.72 127.13,54.17 126.24,53.28 126.24,38.61 DA3.A 122.68,35.05 122.68,25.72 124.46,23.94 SOLA3.2
N$27
  Top 0.508: QF3.B 99.12,47.05 99.12,49.28 100.46,50.61 100.46,57.28 99.12,58.61 99.12,67.06 RF3.P$2
N$28
  Top 0.508: 98.68,36.83 96.46,39.05 96.46,42.61 97.35,43.5 97.79,43.5 98.68,44.39 QF3.C | 98.68,36.83 98.68,28.83 97.35,27.5 97.35,15.49 98.68,14.16 SOLF3.2 | 98.68,36.83 DF3.A
N$29
  Top 0.508: QF#3.B 105.35,47.05 105.35,53.72 100.9,58.17 100.9,62.61 105.35,67.06 RF#3.P$2
N$30
  Top 0.508: 105.79,36.83 108.01,39.05 108.01,42.61 107.12,43.5 106.68,43.5 105.79,44.39 QF#3.C | 105.79,36.83 105.79,28.83 107.12,27.5 107.12,15.49 105.79,14.16 SOLF#3.2 | 105.79,36.83 DF#3.A
N$31
  Top 0.508: RG3.P$2 113.35,65.72 113.35,58.61 112.01,57.28 112.01,54.61 QG3.B
N$32
  Top 0.508: 111.57,36.83 111.57,41.72 109.35,43.94 109.35,50.16 110.24,51.05 110.68,51.05 111.57,51.94 QG3.C | 111.57,36.83 109.79,35.05 109.79,26.16 111.57,24.38 111.57,14.16 SOLG3.2 | 111.57,36.83 DG3.A
N$33
  Top 0.508: QG#3.B 118.24,54.61 118.24,67.06 RG#3.P$2
N$34
  Top 0.508: SOLG#3.2 118.24,14.16 118.24,24.38 120.02,26.16 120.02,35.05 118.24,36.83 DG#3.A
  Bottom 0.508: QG#3.C 117.79,51.94 116.9,51.05 116.46,51.05 112.01,46.61 112.01,42.61 117.79,36.83 DG#3.A
N$35
  Top 0.508: QF4.B 175.58,47.05 175.58,49.72 176.91,51.05 176.91,65.72 175.58,67.06 RF4.P$2
N$36
  Top 0.508: QF4.C 175.58,44.39 176.47,43.5 176.91,43.5 177.8,42.61 177.8,39.05 175.58,36.83 DF4.A 175.13,36.83 175.13,35.5 167.13,27.5 167.13,22.16 175.13,14.16 SOLF4.2
N$37
  Top 0.508: QF#4.B 181.8,47.05 181.8,56.83 183.13,58.17 183.13,65.72 181.8,67.06 RF#4.P$2
N$38
  Top 0.508: 181.8,36.83 184.02,39.05 184.02,42.61 183.13,43.5 182.69,43.5 181.8,44.39 QF#4.C | 181.8,36.83 181.8,28.83 183.58,27.05 183.58,15.94 SOLF#4.2 | 181.8,36.83 DF#4.A
N$39
  Top 0.508: QG4.B 188.02,54.61 188.02,56.83 189.36,58.17 189.36,65.72 188.02,67.06 RG4.P$2
N$40
  Top 0.508: 187.58,36.83 185.36,39.05 185.36,50.16 186.25,51.05 186.69,51.05 187.58,51.94 QG4.C | 187.58,36.83 186.25,35.5 186.25,25.72 187.58,24.38 187.58,14.16 SOLG4.2 | 187.58,36.83 DG4.A
N$41
  Top 0.508: QG#4.B 194.25,54.61 194.25,67.06 RG#4.P$2
N$42
  Top 0.508: 194.69,36.83 196.02,38.16 196.02,45.72 196.91,46.61 196.91,50.16 196.02,51.05 195.58,51.05 194.69,51.94 QG#4.C | 194.69,36.83 196.02,35.5 196.02,25.72 194.69,24.38 194.69,14.16 SOLG#4.2 | 194.69,36.83 DG#4.A
N$43
  Top 0.508: QA4.B 200.91,62.61 200.91,67.06 RA4.P$2
N$44
  Top 0.508: 200.91,36.83 202.25,38.16 202.25,53.28 203.14,54.17 203.14,57.72 201.36,59.5 200.91,59.5 QA4.C | 200.91,36.83 202.69,35.05 202.69,26.16 200.91,24.38 200.91,14.16 SOLA4.2 | 200.91,36.83 DA4.A
N$45
  Top 0.508: QA#4.B 207.14,62.61 207.14,67.06 RA#4.P$2
N$46
  Top 0.508: QA#4.C 207.14,59.5 208.03,59.5 209.36,58.17 209.36,53.72 208.47,52.83 208.47,38.16 207.14,36.83 DA#4.A 206.69,36.83 205.36,35.5 205.36,25.72 206.69,24.38 206.69,14.16 SOLA#4.2
N$47
  Top 0.508: QB4.B 213.36,49.28 215.14,51.05 215.14,65.28 213.36,67.06 RB4.P$2
N$48
  Top 0.508: QB4.C 213.36,44.39 212.47,44.39 210.69,42.61 210.69,39.5 DB4.A 213.36,29.27 211.58,27.5 211.58,15.94 213.36,14.16 SOLB4.2
N$49
  Top 0.508: QC5.B 220.03,47.05 220.03,57.28 221.36,58.61 221.36,65.72 220.03,67.06 RC5.P$2
N$50
  Top 0.508: QC5.C 220.03,44.39 220.92,43.5 221.36,43.5 222.25,42.61 222.25,39.05 220.03,36.83 DC5.A 219.58,36.83 219.58,31.94 217.81,30.16 217.81,15.94 219.58,14.16 SOLC5.2
N$52
  Top 0.508: QA#3.B 130.68,62.61 130.68,67.06 RA#3.P$2
N$53
  Top 0.508: QA#3.C 131.13,59.5 131.57,59.5 133.35,57.72 133.35,54.17 132.46,53.28 132.46,38.16 131.13,36.83 DA#3.A 130.68,36.83 128.91,35.05 128.91,26.16 130.68,24.38 130.68,14.16 SOLA#3.2
N$55
  Top 0.508: QB3.B 137.35,47.05 137.35,49.28 138.68,50.61 138.68,57.28 137.35,58.61 137.35,67.06 RB3.P$2
N$56
  Top 0.508: 137.35,36.83 139.57,39.05 139.57,42.61 138.68,43.5 138.24,43.5 137.35,44.39 QB3.C | 137.35,36.83 137.35,28.83 139.13,27.05 139.13,15.94 SOLB3.2 | 137.35,36.83 DB3.A
N$58
  Top 0.508: QC4.B 143.57,47.05 146.69,47.05 147.57,47.94 147.57,48.83 144.91,51.5 144.91,65.72 143.57,67.06 RC4.P$2
N$59
  Top 0.508: 143.13,36.83 140.91,39.05 140.91,42.61 141.8,43.5 142.24,43.5 143.13,44.39 QC4.C | 143.13,36.83 143.13,28.83 141.8,27.5 141.8,15.49 143.13,14.16 SOLC4.2 | 143.13,36.83 DC4.A
N$61
  Top 0.508: QC#4.B 150.24,54.61 150.24,57.28 151.57,58.61 151.57,65.72 150.24,67.06 RC#4.P$2
N$62
  Top 0.508: QC#4.C 150.24,51.94 151.13,51.05 151.57,51.05 152.46,50.16 152.46,46.61 150.24,44.39 150.24,36.83 DC#4.A 149.8,36.83 148.02,35.05 148.02,26.16 149.8,24.38 149.8,14.16 SOLC#4.2
N$64
  Top 0.508: QD4.B 156.46,54.61 156.46,67.06 RD4.P$2
N$65
  Top 0.508: 156.46,36.83 157.8,38.16 157.8,45.72 158.69,46.61 158.69,50.16 157.8,51.05 157.35,51.05 156.46,51.94 QD4.C | 156.46,36.83 158.24,35.05 158.24,26.16 156.46,24.38 156.46,14.16 SOLD4.2 | 156.46,36.83 DD4.A
N$67
  Top 0.508: QD#4.B 162.69,62.61 162.69,67.06 RD#4.P$2
N$68
  Top 0.508: QD#4.C 162.69,59.5 163.58,59.5 164.91,58.17 164.91,53.72 164.02,52.83 164.02,38.16 162.69,36.83 DD#4.A 162.24,36.83 160.91,35.5 160.91,25.72 162.24,24.38 162.24,14.16 SOLD#4.2
N$70
  Top 0.508: RE4.P$2 QE4.B
N$71
  Top 0.508: QE4.C 168.91,59.5 169.8,59.5 171.58,57.72 171.58,54.17 170.69,53.28 170.69,38.61 DE4.A 166.24,34.16 166.24,21.72 168.91,19.05 SOLE4.2
NU32GND  (via drill 0.38)
  Top 0.508: v217.81,87.95 22.23,87.95 12.45,78.17 12.45,74.17 14.22,72.39 14.22,36.83 12,34.61 12,33.72 X1.18 | NU32_JACK.GND 229.81,86.17 228.03,86.17 225.36,83.5 NU32_JACK.GNDBREAK
  Bottom 0.508: v217.81,87.95 220.47,87.95 224.92,83.5 NU32_JACK.GNDBREAK
NU32PWR  (via drill 0.38)
  Top 0.508: v179.58,79.95 v159.58,79.95
  Bottom 0.508: v159.58,79.95 56.9,79.95 42.67,65.72 26.23,65.72 20.89,60.39 10.22,60.39 9.78,59.94 9.78,59.05 7.56,56.83 5.33,56.83 4.45,55.94 4.45,35.94 5.78,34.61 5.78,33.72 X1.6 | v179.58,79.95 181.36,79.95 183.13,81.72 220.92,81.72 221.36,82.17 222.25,82.17 224.03,80.39 229.81,80.39 NU32_JACK.PWR
PS_ON
  Top 0.508: X1.16 11.56,25.27 11.56,26.16 8,29.72 8,74.17 9.78,75.95 S1.2
PS_ONGND
  Top 0.508: X1.15 12,21.27 12,22.16 15.11,25.27 15.11,75.95 S1.3
RPI_GND
  Top 0.508: RPI_JACK.GNDBREAK 234.25,10.6 232.92,10.6 230.25,7.94 RPI_JACK.GND
  Bottom 0.508: X1.3 6.22,20.83 8.45,20.83 10.22,19.05 68.45,19.05 71.12,21.72 108.46,21.72 110.68,19.49 218.25,19.49 229.81,7.94 RPI_JACK.GND
RPI_PWR
  Bottom 0.508: X1.4 6.22,24.83 8.45,24.83 10.22,23.05 217.81,23.05 219.58,21.27 222.25,21.27 229.81,13.72 RPI_JACK.PWR
VDD1
  Top 0.508: 26.23,8.83 28.89,8.83 SOLF#2.1 29.34,8.83 35.56,8.83 | 26.23,8.83 23.11,8.83 SOLF2.1 | 35.56,8.83 41.78,8.83 SOLG#2.1 42.23,8.83 48.01,8.83 SOLA2.1 48.45,8.83 54.23,8.83 SOLA#2.1 54.67,8.83 60.9,8.83 SOLB2.1 61.34,8.83 67.12,8.83 SOLC3.1 67.56,8.83 73.34,8.83 SOLC#3.1 73.79,8.83 80.01,8.83 | 35.56,8.83 SOLG2.1 | SOLG#3.1 117.79,8.83 112.01,8.83 SOLG3.1 111.57,8.83 105.79,8.83 SOLF#3.1 105.35,8.83 99.12,8.83 SOLF3.1 98.68,8.83 92.9,8.83 SOLE3.1 92.46,8.83 86.68,8.83 SOLD#3.1 86.23,8.83 80.01,8.83 | 80.01,8.83 SOLD3.1 | DG#3.C 117.79,27.05 112.01,27.05 DG3.C | DD3.C 80.01,27.05 86.23,27.05 DD#3.C | DF#3.C 105.35,27.05 99.12,27.05 DF3.C | DG2.C 35.56,27.05 41.78,27.05 DG#2.C | 26.23,27.05 28.89,27.05 DF#2.C | 26.23,27.05 23.11,27.05 DF2.C | DB2.C 60.9,27.05 54.67,27.05 DA#2.C | 26.23,27.05 26.23,8.83
  Bottom 0.508: DF#3.C 105.79,27.05 111.57,27.05 DG3.C | DB2.C 61.34,27.05 67.12,27.05 DC3.C 67.56,27.05 73.34,27.05 DC#3.C 73.79,27.05 80.01,27.05 DD3.C | DF3.C 98.68,27.05 92.9,27.05 DE3.C 92.46,27.05 86.68,27.05 DD#3.C | DA#2.C 54.23,27.05 48.45,27.05 DA2.C 48.01,27.05 42.23,27.05 DG#2.C | X1.10 6.22,50.16 6.22,49.28 9.78,45.72 9.78,40.39 10.67,39.5 12.89,39.5 22.67,29.72 22.67,27.05 DF2.C | DG2.C 35.56,27.05 29.34,27.05 DF#2.C
VDD2
  Top 0.508: SOLA3.1 124.46,8.83 130.68,8.83 SOLA#3.1 131.13,8.83 134.24,8.83 | 134.24,8.83 136.91,8.83 SOLB3.1 137.35,8.83 143.13,8.83 SOLC4.1 143.57,8.83 149.8,8.83 SOLC#4.1 150.24,8.83 156.02,8.83 SOLD4.1 156.46,8.83 162.24,8.83 SOLD#4.1 162.69,8.83 168.91,8.83 | 213.36,8.83 207.14,8.83 SOLA#4.1 206.69,8.83 200.91,8.83 SOLA4.1 200.47,8.83 194.69,8.83 SOLG#4.1 194.25,8.83 188.02,8.83 SOLG4.1 187.58,8.83 181.8,8.83 SOLF#4.1 181.36,8.83 175.58,8.83 SOLF4.1 175.13,8.83 168.91,8.83 | 213.36,8.83 219.58,8.83 SOLC5.1 | 213.36,8.83 SOLB4.1 | 168.91,8.83 SOLE4.1 | DC#4.C 150.24,27.05 156.02,27.05 DD4.C | DE4.C 168.91,27.05 175.13,27.05 DF4.C 175.58,27.05 181.36,27.05 DF#4.C | DG#4.C 194.25,27.05 188.02,27.05 DG4.C | 134.24,27.05 131.13,27.05 DA#3.C | 134.24,27.05 136.91,27.05 DB3.C | 134.24,27.05 134.24,8.83
  Bottom 0.508: DG#4.C 194.69,27.05 200.47,27.05 DA4.C 200.91,27.05 206.69,27.05 DA#4.C 207.14,27.05 213.36,27.05 | 213.36,27.05 219.58,27.05 DC5.C | 213.36,27.05 DB4.C | DD4.C 156.46,27.05 162.24,27.05 DD#4.C 162.69,27.05 168.91,27.05 DE4.C | DF#4.C 181.8,27.05 187.58,27.05 DG4.C | DB3.C 137.35,27.05 143.13,27.05 DC4.C 143.57,27.05 149.8,27.05 DC#4.C | 124.46,27.05 130.68,27.05 DA#3.C | 124.46,27.05 119.57,31.94 44.45,31.94 34.67,41.72 34.67,44.83 30.67,48.83 21.78,48.83 18.22,52.39 10.67,52.39 8.89,54.17 6.22,54.17 X1.11 | 124.46,27.05 DA3.C
(copper drawn outside any net)
  shapes: Top area x1

## Text on the board
Document: OFF | ON | AUTOSPIEL v1.2b | Designer: Jonathan Westerfield '19 | NU32_PWR | F2 | A3 | F#2 | A#3 | G2 | B3 | G#2 | C4 | A2 | C#4 | A#2 | D4 | B2 | D#4 | C3 | E4 | C#3 | F4 | D3 | F#4 | D#3 | G4 | E3 | G#4 | PSU_PWR_CONN | F3 | A4 | F#3 | A#4 | G3 | B4 | G#3 | C5 | F2 | F#2 | G2 | G#2 | A2 | A#2 | B2 | C3 | C#3 | D3 | D#3 | E3 | F3 | F#3 | G3 | G#3 | A3 | A#3 | B3 | C4 | C#4 | D4 | D#4 | E4 | F4 | F#4 | G4 | G#4 | A4 | A#4 | B4 | C5 | RPI_PWR